# EAGLE board BEP31_final_kopie_90Grad (EAGLE 6.5.0)
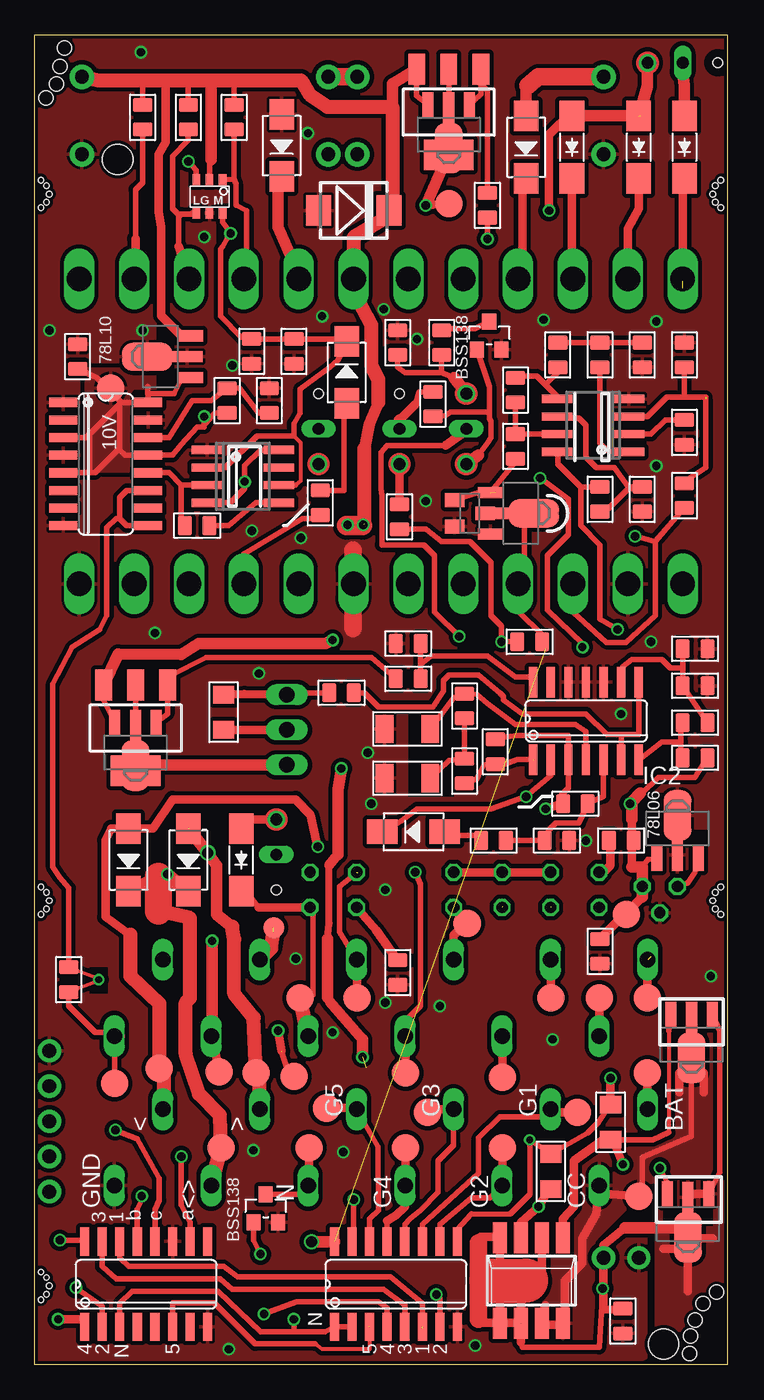
[diagram p0: board, top side]
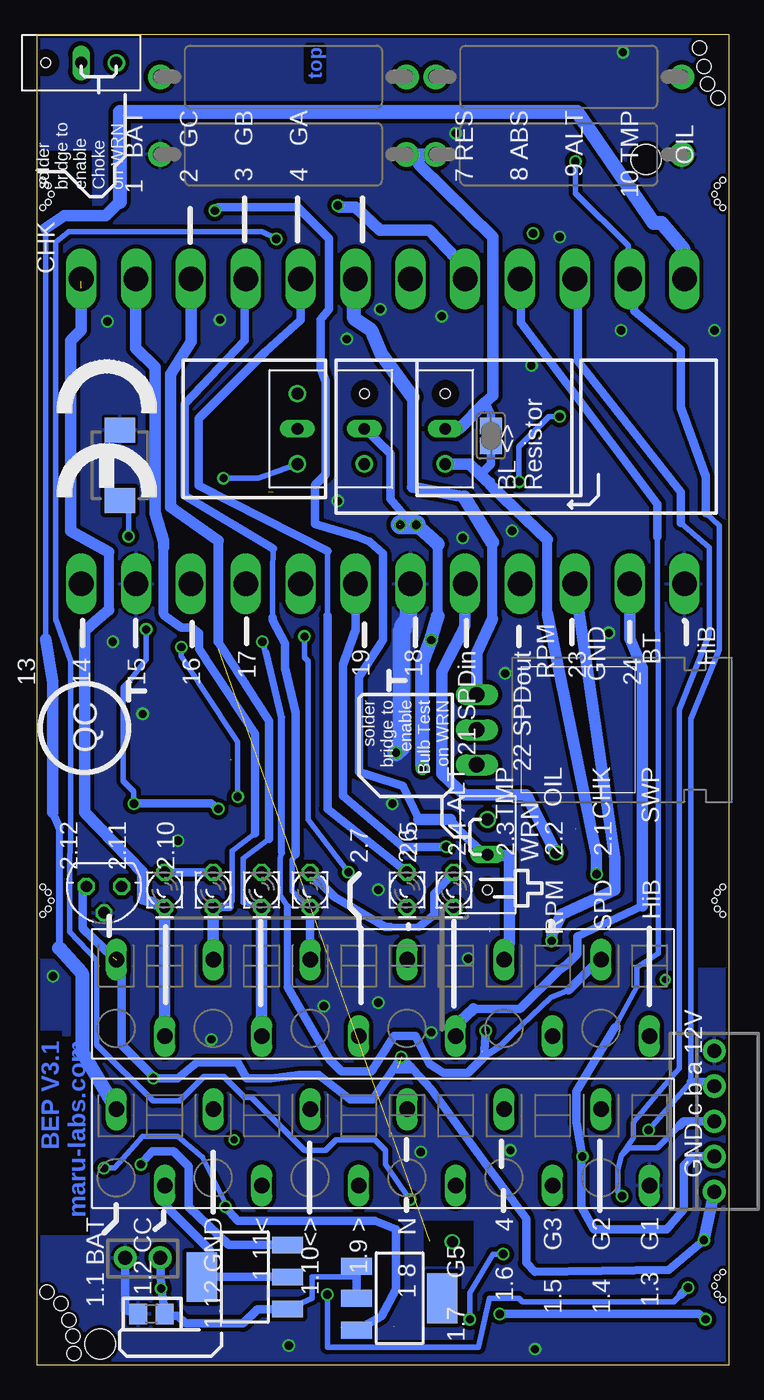
[diagram p1: board, bottom side, seen from below]

Size 50 x 96 mm. Coordinates in mm from the lower left corner, seen from the top.
Outline: 50,96 50,0 0,0 0,96 50,96
Copper layers (1*16): Top 0.035mm / dielectric 1.5mm / Bottom 0.035mm
Design rules "multi-cb_035um-cu *": minimum track width 6mil, minimum drill 12mil, track to track 12mil, track to pad 12mil, pad to pad 6mil, via to via 6mil, smd to smd 6mil, copper to edge 10mil, drill to drill 8mil, minimum pad ring 8mil, minimum via ring 6mil, stop-mask expansion 3mil, vias tented up to drill 0mil, thermal gap 8mil
Holes 1.02 mm at 47.29,0.81 47.36,2.08 47.67,3.23 48.25,4.43 49.23,5.24 2.14,95.05 1.83,93.71 1.57,92.44 0.81,91.43
Holes 2.18 mm at 45.4,1.5 6,87
Holes 0.4 mm at 48.94,33.5 49.14,34.1 49.54,34.5 49.14,32.9 49.54,32.5 48.94,84.5 49.14,85.1 49.54,85.5 49.14,83.9 49.54,83.5 1.06,84.5 0.86,83.9 0.46,83.5 0.86,85.1 0.46,85.5 1.06,33.5 0.86,32.9 0.46,32.5 0.86,34.1 0.46,34.5 1.06,5.7 0.86,5.1 0.46,4.7 0.86,6.3 0.46,6.7
tRestrict: area 27,41 to 30.3,47.5; area 4,26.8 to 5.3,28.7; area 32.7,58.4 to 34.7,60.2; area 5.1,44.1 to 9.4,45.5; area 44.1,37.3 to 48.6,38.6; area 44.2,38.6 to 45.4,41.3; area 45.4,10 to 48.9,11.4; area 8.8,70.3 to 10.1,75; area 27.7,88.4 to 28.9,90; area 13.1,81.1 to 13.3,82.2
bRestrict: area 46.1,9.4 to 49.7,19.6; area 48.2,19.5 to 49.7,24.1; area 47.8,29.3 to 50,35.8; area 0.2,28.7 to 2.6,35.2; area 46,81.6 to 49.8,87.6; area 18.5,7.1 to 22,10.4

## Footprints (pad centres in the part's own frame; a part is rotated, then mirrored left to right if it is on the bottom)
12-PIN = drill 1.118 long: 1 19.25,-2.45; 2 15.75,3.05; 3 12.25,-2.45; 4 8.75,3.05; 5 5.25,-2.45; 6 1.75,3.05; 7 -1.75,-2.45; 8 -5.25,3.05; 9 -8.75,-2.45; 10 -12.25,3.05; 11 -15.75,-2.45; 12 -19.25,3.05
B2.0 = smd 2 x 2: TP 0,0
C0805 = smd 1.397 x 1.016: 1 0,0.889; 2 0,-0.889
C1206 = smd 1.27 x 2.032: 1 -1.651,0; 2 1.651,0
DO-214AC = smd 2.2 x 1.77: 1 -2.242,0; 2 2.242,0
DO-214AC_SLIM = smd 2.2 x 1.77: 1 -2.242,0; 2 2.242,0
DO214AA = smd 1.8 x 2.2: A 2.55,0; C -2.55,0
DO214AA_BI = smd 1.8 x 2.2: A 2.45,0; C -2.65,0
ROUND_1.5MM_TPLACE = smd 1.5 x 1.5: P$1 0,0
78LXX = drill 0.813 octagon: GND 0,1.905; IN 1.27,0; OUT -1.27,0
SOT89_ROUND = smd 0.8 x 1.8: 1 -1.499,-2.181; 3 1.499,-2.181 | smd 0.8 x 2.3: 2 0,-1.927 | smd 2.032 x 3.65: 2@1 0,0.94
SO16 = smd 0.66 x 2.032: 1 -4.445,-3.073; 2 -3.175,-3.073; 3 -1.905,-3.073; 4 -0.635,-3.073; 5 0.635,-3.073; 6 1.905,-3.073; 7 3.175,-3.073; 8 4.445,-3.073; 9 4.445,3.073; 10 3.175,3.073; 11 1.905,3.073; 12 0.635,3.073; 13 -0.635,3.073; 14 -1.905,3.073; 15 -3.175,3.073; 16 -4.445,3.073
TO220H_NOHOLE = drill 1.118 long: 1 -2.54,-10.16; 2 0,-10.16; 3 2.54,-10.16
SO08 = smd 0.6 x 2.2: 1 -1.905,-2.6; 2 -0.635,-2.6; 3 0.635,-2.6; 4 1.905,-2.6; 5 1.905,2.6; 6 0.635,2.6; 7 -0.635,2.6; 8 -1.905,2.6
SO14 = smd 0.6 x 2.2: 1 -3.81,-2.8; 2 -2.54,-2.8; 3 -1.27,-2.8; 4 0,-2.8; 5 1.27,-2.8; 6 2.54,-2.8; 7 3.81,-2.8; 8 3.81,2.8; 9 2.54,2.8; 10 1.27,2.8; 11 0,2.8; 12 -1.27,2.8; 13 -2.54,2.8; 14 -3.81,2.8
JP2_SMALLPADS = drill 0.85: 1 -2.54,0 | drill 0.85 long: 2 0,0 | hole 0.7: 2.54,0
LD260 = drill 0.813 octagon: A -1.27,0; K 1.27,0
SOT89 = smd 0.8 x 1.8: 1 -1.499,-2.181; 3 1.499,-2.181 | smd 0.8 x 2.3: 2 0,-1.927 | smd 2.032 x 3.65: 2@1 0,0.94
SOT223 = smd 1.219 x 2.235: 1 -2.311,-3.099; 2 0,-3.099; 3 2.311,-3.099 | smd 3.6 x 2.2: 4 0,3.099
SOT-23 = smd 1.016 x 1.143: 1 -0.889,-1.016; 2 0.889,-1.016; 3 0,1.016
R0805 = smd 1.397 x 1.016: 1 0,0.889; 2 0,-0.889
R1206 = smd 1.27 x 1.524: 1 -1.27,0; 2 1.27,0
V235/17_1MM = drill 1 pad 1.778: 1 -8.89,0; 2 8.89,0
R0805' = smd 1.3 x 1.5: 1 -0.95,0; 2 0.95,0
SJ = smd 1.2 x 1.6: 1 -0.725,0; 2 0.725,0
SM8 = smd 1.016 x 2.235: 1 -2.286,-3.099; 2 -0.762,-3.099; 3 0.762,-3.099; 4 2.286,-3.099; 5 2.286,3.099; 6 0.762,3.099; 7 -0.762,3.099; 8 -2.286,3.099
SOT23-BEC = smd 1 x 1.4: B -0.95,-1.1; C 0,1.1; E 0.95,-1.1
B1,27 = smd 1.5 x 1.5: TP 0,0
JP2_ORIG_SMALLPADS = drill 0.85: 1 -2.54,0; 3 2.54,0 | drill 0.85 long: 2 0,0
SOT457R_PHILIPS = smd 0.55 x 0.8: 1 -0.95,-1.2; 2 0,-1.2; 3 0.95,-1.2; 4 0.95,1.2; 5 0,1.2; 6 -0.95,1.2
24-PIN_V2 = drill 1.778 long: 1 -21.78,-11; 2 -17.82,-11; 3 -13.86,-11; 4 -9.9,-11; 5 -5.94,-11; 6 -1.98,-11; 7 1.98,-11; 8 5.94,-11; 9 9.9,-11; 10 13.86,-11; 11 17.82,-11; 12 21.78,-11; 13 -21.78,11; 14 -17.82,11; 15 -13.86,11; 16 -9.9,11; 17 -5.94,11; 18 -1.98,11; 19 1.98,11; 20 5.94,11; 21 9.9,11; 22 13.86,11; 23 17.82,11; 24 21.78,11
22-23-2021 = drill 1 pad 1.676: 1 -1.27,0; 2 1.27,0
22-23-2051 = drill 1 pad 1.676: 1 -5.08,0; 2 -2.54,0; 3 0,0; 4 2.54,0; 5 5.08,0

## Placement (x,y rotation side)
1  [12-PIN]  25,15.99 180 bottom
2  [12-PIN]  25,26.79 180 bottom
6V  TPSB2.0  [B2.0]  42.72,32.5 90 top
10V  TPSB2.0  [B2.0]  5.5,70.5 90 top
C1  2.2nF  [C0805]  18.72,73.14 180 top
C2  100u  [C1206]  26.91,42.34 180 top
C3  100u  [C1206]  26.91,45.9 180 top
C4  100nF,  [C0805]  40.82,29.83 0 top
C5  100nF.  [C0805]  47.67,49.01 90 top
C7  100nF  [C0805]  3.1,72.76 180 top
C8  4.7u  [C0805]  46.91,72.89 180 top
C9  100nF.  [C0805]  26.97,52.06 90 top
C10  100nF  [C0805]  16.94,69.58 180 top
C11  100nF,  [C0805]  43.86,72.89 0 top
D1  1N4007.  [DO-214AC]  35.48,87.87 270 top
D2  1N5817  [DO-214AC_SLIM]  38.78,87.87 270 top
D3  1N4007  [DO-214AC]  22.53,71.62 90 top
D4  SM6T  [DO214AA]  23.04,83.3 180 top
D5  SM6TDO214AA_BI  [DO214AA_BI]  43.99,65.01 90 bottom
D8  1N4007  [DO-214AC]  27.35,38.47 180 top
D10  1N4007,  [DO-214AC]  11.1,36.44 270 top
D11  1N4007,  [DO-214AC]  6.78,36.44 270 top
D12  1N5817.  [DO-214AC_SLIM]  43.61,87.87 270 top
D13  1N5817.  [DO-214AC_SLIM]  46.91,87.87 270 top
D14  1N5817  [DO-214AC_SLIM]  14.91,36.44 270 top
D15  1N4007.  [DO-214AC]  17.83,88 270 top
FID1  FID1  [ROUND_1.5MM_TPLACE]  5.74,23.74 90 top
FID2  FID2  [ROUND_1.5MM_TPLACE]  42.81,78.37 90 top
IC1  6V pos  [78LXX]  45.13,34.53 180 bottom
IC2  78L06  [SOT89_ROUND]  46.4,38.72 0 top
IC3  4028  [SO16]  8.05,5.83 0 top
IC4  317TO202H_NOHOLE  [TO220H_NOHOLE]  8.05,45.84 270 bottom
IC5  555  [SO08]  15.04,64.12 270 top
IC6  ULN2004  [SO16]  26.08,5.83 0 top
IC7  LM339  [SO14]  39.8,46.47 0 top
IC8  4538  [SO16]  5.13,65.01 270 top
IC9  78L10  [SOT89_ROUND]  9.07,72.76 90 top
IC10  LM2904  [SO08]  40.31,67.81 90 top
JP1  [JP2_SMALLPADS]  20.5,67.55 90 bottom
JP2  [JP2_SMALLPADS]  46.78,93.97 180 bottom
JP3  [JP2_SMALLPADS]  26.34,67.55 90 bottom
JP4  [JP2_SMALLPADS]  17.45,36.82 270 bottom
LED1  [LD260]  40.75,34.28 270 bottom
LED2  [LD260]  37.25,34.28 270 bottom
LED3  [LD260]  33.75,34.28 270 bottom
LED4  [LD260]  30.25,34.28 270 bottom
LED6  [LD260]  23.25,34.28 270 bottom
LED7  [LD260]  19.88,34.28 270 bottom
Q1  BA  [SOT89]  29.89,88.76 180 top
Q2  BA  [SOT89]  7.29,44.18 180 top
Q3  AH-16  [SOT223]  29.89,90.41 180 top
Q4  (AH-16)  [SOT223]  7.29,45.96 180 top
Q5  (AH-16)  [SOT223]  34.97,6.34 90 bottom
Q6  (AH-16)  [SOT223]  23.8,4.81 270 bottom
Q7  BA.  [SOT89]  47.17,10.15 180 top
Q8  BA.  [SOT89]  47.42,23.1 180 top
Q9  MY  [SOT89]  35.1,61.46 270 top
Q10  J1  [SOT-23]  32.81,74.28 0 top
Q11  J1  [SOT-23]  16.69,11.29 0 top
R1  4701  [R0805]  46.91,62.73 0 top
R2  1002  [R0805]  46.91,67.3 180 top
R3  100  [R0805]  35.74,52.19 90 top
R4  (101)  [R0805]  26.21,28.31 0 top
R5  1002  [R0805]  22.15,48.5 270 top
R6  1502  [R0805]  47.67,43.8 90 top
R7  100  [R0805]  29.39,73.78 180 top
R8  2702  [R0805]  47.67,51.68 270 top
R9  4701  [R0805]  26.97,49.52 90 top
R10  104  [R0805]  31.04,42.85 0 top
R11  (1000)  [R0805]  42.34,37.83 90 top
R12  104  [R0805]  31.04,47.55 0 top
R13  102  [R0805]  32.69,83.68 180 top
R14  (101)  [R0805]  26.21,73.78 180 top
R15  1502  [R0805]  39.04,40.5 270 top
R16  1002  [R0805]  37.7,37.83 270 top
R17  2201  [R0805]  33.13,37.83 90 top
R18  13  [R1206]  13.64,47.1 270 top
R19  1002  [R0805]  33.26,44.25 0 top
R20  13  [R1206]  37.26,13.96 270 top
R21  13  [R1206]  41.58,17.51 270 top
R22  104  [R0805]  28.75,69.33 0 top
R23  2201  [R0805]  26.34,61.2 180 top
R24  104  [R0805]  15.67,73.14 0 top
R25  2702  [R0805]  47.67,46.34 90 top
R26  (1002)  [R0805]  11.73,60.57 90 top
R27  47  [V235/17_1MM]  32.18,92.95 0 bottom
R28  47  [V235/17_1MM]  12.3,92.95 0 bottom
R29  104  [R0805]  7.8,90.03 180 top
R30  104  [R0805]  11.1,90.03 180 top
R31  104  [R0805]  14.4,90.03 180 top
R32  4701  [R0805]  34.72,66.28 0 top
R33  2702  [R0805]  20.62,62.22 0 top
R34  2702  [R0805]  13.89,69.58 0 top
R35  (1002)  [R0805]  2.46,27.8 180 top
R36  47  [V235/17_1MM]  32.18,87.36 0 bottom
R37  47  [V235/17_1MM]  12.3,87.36 180 bottom
R38  102  [R0805]  42.47,3.16 0 top
R39  R_user  [R0805']  41.7,3.67 180 bottom
R42  1002  [R0805]  40.82,72.89 0 top
R43  102  [R0805]  37.77,72.89 0 top
R44  2702  [R0805]  34.72,70.35 180 top
R45  102  [R0805]  40.82,62.47 180 top
R46  102  [R0805]  43.86,62.47 180 top
SJ1  [SJ]  17.19,67.04 90 bottom
START  TPSB2.0  [B2.0]  29.89,83.81 90 top
T1  PNP2SM8  [SM8]  35.86,6.08 180 top
T3  (1D)  [SOT23-BEC]  31.42,61.46 270 top
TP1  TPSB2.0  [B2.0]  44.24,21.07 90 top
TP2  TPSB2.0  [B2.0]  43.61,12.18 90 top
TP3  TPSB2.0  [B2.0]  39.16,18.21 90 top
TP4  TPSB2.0  [B2.0]  33.77,15.67 90 top
TP5  TPSB2.0  [B2.0]  28.37,18.21 90 top
TP6  TPSB2.0  [B2.0]  26.78,15.67 90 top
TP7  TPSB2.0  [B2.0]  21.07,18.53 90 top
TP8  TPSB2.0  [B2.0]  19.8,15.67 90 top
TP9  TPSB2.0  [B2.0]  15.99,21.07 90 top
TP10  TPSB2.0  [B2.0]  13.45,15.67 90 top
TP11  TPSB2.0  [B2.0]  9,21.39 90 top
TP12  TPSB2.0  [B2.0]  44.24,26.47 90 top
TP13  TPSB2.0  [B2.0]  5.76,20.31 90 top
TP16  TPSB2.0  [B2.0]  40.75,26.47 90 top
TP17  TPSB2.0  [B2.0]  37.26,26.47 90 top
TP18  TPSB2.0  [B2.0]  33.77,20.75 90 top
TP19  TPSB2.0  [B2.0]  31.23,31.86 90 top
TP21  TPSB2.0  [B2.0]  26.78,21.07 90 top
TP22  TPSB2.0  [B2.0]  23.29,26.47 90 top
TP23  TPSB2.0  [B2.0]  19.16,26.47 90 top
TP24  TPSB1,27  [B1,27]  17.26,31.55 90 top
TP25  TPSB2.0  [B2.0]  13.32,21.13 90 top
TP26  TPSB2.0  [B2.0]  18.72,20.82 90 top
U$1  [CE_10.00]  48.56,72.63 270 bottom
U$2  JP2E_ORIG  [JP2_ORIG_SMALLPADS]  31.16,67.55 90 bottom
U$3  NUP4304SOT457_R  [SOT457R_PHILIPS]  12.62,84.32 180 top
X1  [24-PIN_V2]  25,67.36 180 bottom
X2  22-23-2021  [22-23-2021]  42.34,7.74 0 bottom
X3  22-23-2051  [22-23-2051]  1.06,17.58 90 bottom

## Library data of the parts
1 2 = con WAGO BMW
6V 10V START TP1-TP13 TP16-TP19 TP21-TP26 = testpin_BMW
C1 C4 C5 C7 C9-C11 = Seeed-Capacitor-2016; MPN: CC0805KRX7R9BB104
C2 C3 = Seeed-Capacitor-2016; MPN: GRM31CR60J107ME39L
C8 = Seeed-Capacitor-2016; MPN: CC0805KKX5R8BB475
D1 D3 D8 D10 D11 D15 = Diode-do214ac; MPN: 1N4007
D2 D12-D14 = Diode-do214ac
D4 D5 = Suppressor_Diode_DO214AA
FID1 FID2 = Fiducials_TVM802B
IC1 = v-reg
IC2 IC9 = 78LXX
IC3 = 4028
IC4 IC10 = linear_BMW
IC5 = linear
IC6 = uln-udn
IC7 = LM339
IC8 = 45xx
JP1-JP4 U$2 = Switch Aliexpress 2
LED1-LED4 LED6 LED7 = led
Q1 Q2 Q7-Q9 = Transistor_SOT89
Q3-Q6 = BCP53_
Q10 Q11 = Seeed-Transistor-2016; MPN: BSS138W-7-F
R1 R8 R9 R25 R32 R34 R35 R44 = Seeed-Resistor-2016; MPN: RC0805JR-074K7L
R2 R5 R6 R10 R12 R15 R16 R19 R22 R24 R26 R29-R31 R33 R42 = Seeed-Resistor-2016; MPN: RC0805FR-0710KL
R3 = Seeed-Resistor-2016; MPN: RC0805JR-07220RL
R4 R11 = Seeed-Resistor-2016; MPN: RC0805JR-07100RL
R7 R14 R17 R23 = Seeed-Resistor-2016; MPN: RC0805JR-072K2L
R13 R38 R43 R45 R46 = Seeed-Resistor-2016; MPN: RC0805JR-071KL
R18 R20 R21 = Seeed-Resistor-2016; MPN: RC1206JR-0713RL
R27 R28 R36 R37 R39 = rcl
SJ1 = solder-jumper
T1 = PNP2SM8; OC_FARNELL: unknown; OC_NEWARK: unknown
T3 = transistor
U$1 = logo
U$3 = NUP4304_ESD_Diode_Array
X1 = con_BMW
X2 = con_Molex_BMW; MF: MOLEX; MPN: 22-23-2021; OC_FARNELL: 1462926; OC_NEWARK: 25C3832
X3 = con_Molex_BMW; MF: MOLEX; MPN: 22-23-2051; OC_FARNELL: 1462952; OC_NEWARK: 38C9178

## Nets
+10V: 10V.TP C7.1 IC5.4 IC5.8 IC8.3 IC8.5 IC8.13 IC8.16 IC9.1 R34.2
+12V: 2.1 D4.C IC1.IN IC2.3 IC3.16 IC6.9 IC9.3 JP3.2 Q1.3 Q2.3 Q3.3 Q4.3 R20.1 R21.1 R22.1 R28.2 R29.2 R30.2 R31.2 TP12.TP U$3.2 X1.6 X3.1
+12V1: IC10.7 R32.1 R44.1
GND: 1.12 C1.1 C2.2 C3.2 C4.2 C5.2 C7.2 C8.2 C9.1 C10.2 C11.2 D4.A D5.A D15.1 IC1.GND IC2.2 IC2.2@1 IC3.8 IC3.11 IC5.1 IC6.8 IC7.10 IC7.11 IC7.12 IC8.1 IC8.4 IC8.8 IC8.15 IC9.2 IC9.2@1 IC10.4 Q9.3 Q10.2 Q11.2 R2.1 R4.2 R8.1 R14.2 R16.1 R24.2 R36.1 R37.1 R38.2 R39.2 R46.1 T3.E U$3.5 X1.13 X1.18 X1.23 X2.1 X3.5
N$1: 2.9 D2.1 D12.1 JP2.1 JP4.2 TP24.TP
N$2: IC3.10 R31.1 U$3.1 X1.4 X3.2
N$3: IC3.13 R30.1 U$3.4 X1.3 X3.3
N$4: 2.7 LED6.A TP22.TP X1.8
N$5: Q5.3 Q8.3 R21.2 T1.1
N$6: D8.2 IC7.2 Q10.1 R22.2 U$2.1
N$7: IC10.2 R2.2
N$8: R27.2 R28.1
N$9: Q6.3 Q7.3 R20.2 T1.3
N$11: D15.2 Q1.2 Q3.2 START.TP X1.5
N$12: 2.2 D13.2 LED1.K TP16.TP X1.12
N$13: 2.3 D12.2 LED2.K TP17.TP X1.11
N$14: 2.4 D2.2 LED3.K TP18.TP X1.10
N$15: IC4.3 Q2.2 Q4.2
N$16: IC7.6 IC7.8 R5.1
N$17: IC3.12 R29.1 U$3.3 X1.2 X3.4
N$18: IC3.15 IC6.5
N$19: 2.8 D14.2 LED7.K TP23.TP X1.14
N$20: 1.9 D10.1 TP9.TP X1.17
N$21: 1.11 D11.1 TP11.TP X1.19
N$22: IC8.9 IC8.11 R35.2
N$23: D5.C R1.2 X1.22
N$24: C8.1 IC10.3 R1.1
N$25: 1.6 IC6.13 TP6.TP
N$26: 1.7 IC6.14 TP7.TP
N$27: 2.11 R3.1 R23.1 TP26.TP
N$28: 2.6 TP21.TP U$2.2
N$29: JP3.1 R23.2
N$30: C5.1 IC7.9 R8.2 R25.2
N$31: C9.2 IC7.14 R9.2
N$32: C1.2 D3.2 IC5.2 IC5.6 R24.1 U$3.6
N$34: LED6.K R4.1
N$35: IC4.1 R5.2 R18.1 X1.7
N$36: Q2.1 Q4.1 R9.1
N$37: IC3.2 IC6.7
N$38: 1.3 IC6.11 TP3.TP
N$39: 1.5 IC6.12 TP5.TP
N$41: LED1.A LED2.A LED3.A LED4.A LED7.A R11.1
N$42: R33.2 X1.16
N$43: Q1.1 Q3.1 R13.2
N$44: IC3.3 IC6.1 IC6.2 Q11.1
N$45: C2.1 R10.1 R12.2
N$46: C3.1 IC7.4 R12.1
N$47: IC7.5 R15.1 R16.2 R17.2
N$48: Q10.3 R7.2
N$49: D8.1 R17.1
N$50: IC3.1 IC6.4
N$52: 1.8 Q11.3 TP8.TP
N$53: 2.10 TP25.TP X1.15
N$54: D1.1 R27.1
N$55: 2.5 D1.2 LED4.K TP19.TP X1.9
N$56: IC3.14 IC6.6
N$57: Q5.1 Q6.1 Q6.2 Q7.1 Q7.2 Q8.1 R38.1 R39.1 T1.2 T1.4 T1.6 X2.2
N$59: 1.2 Q5.2 Q8.2 T1.8 TP2.TP
N$60: IC7.13
N$61: IC3.6 IC6.3
N$64: IC4.2 R18.2
N$65: IC5.5 R26.2
N$67: 1.4 IC6.10 TP4.TP
N$69: 1.1 TP1.TP X1.1
N$83: IC7.7 R6.1 R25.1
N$84: IC6.16 Q9.2 R3.2 T3.C X1.21
N$85: Q9.1 R32.2 T3.B
N$86: IC5.3 IC8.12 R26.1
N$87: D3.1 R33.1
N$88: IC6.15 R13.1
N$89: C10.1 IC8.14 R34.1
N$90: 2.12 R35.1 TP13.TP
N$92: IC10.1 R42.2
N$93: 1.10 D10.2 D11.2 JP1.1 SJ1.1 TP10.TP
N$94: JP1.2 R36.2 R37.2 SJ1.2
N$95: D13.1 JP2.2
N$96: C11.1 R42.1 R43.1
N$97: IC10.5 R43.2 R44.2
N$98: D14.1 JP4.1
N$99: R7.1 R14.1 U$2.3
N$101: IC10.6 R45.1 R46.2
N$580: IC7.1 R10.2 R19.2
VCC: 6V.TP C4.1 IC1.OUT IC2.1 IC7.3 IC10.8 R6.2 R11.2 R15.2 R19.1 R45.2

## Tracks (layer width: path | path; a pad name or v marks a point on that pad's centre or on a via)
+10V  (via drill 0.6)
  Top 0.406: 6.14,69.33 3.73,66.92 IC8.3 | 6.27,69.46 IC8.16 8.18,70.6 8.18,70.09 10.08,70.09 10.59,71.11 10.99,71.26 IC9.1 | 12.11,67.68 13,68.69 R34.2 | 6.14,66.16 6.14,66.03 6.53,65.65 IC8.13 9.96,65.65 10.59,66.41 11.73,67.68 12.11,67.68 | 6.14,66.16 6.14,69.33 | 6.14,69.33 6.27,69.46 | IC5.4 14.15,62.22 15.16,63.23 v15.16,63.74 15.16,64.89 16.3,66.03 IC5.8 | C7.1 4.49,71.23 6.27,69.46 | v12.24,68.44 12.24,67.68 12.11,67.68 | IC8.5 3.99,64.38 | 3.99,64.38 4.37,64.38 6.14,66.16 | 3.99,64.38 3.99,67.04
  Bottom 0.406: v12.24,68.44 13,68.44 15.16,66.28 v15.16,63.74
  pour Top: 3.73,64.38 3.73,71.87 9.7,71.87 9.7,70.47 7.16,70.47 6.78,70.09 6.78,64.5 3.86,64.5
+12V  (via drill 0.5, 0.6)  (3 unrouted)
  Top 0.35: 31.55,10.91 34.34,10.91
  Top 0.406: IC3.16 3.6,9.01 v1.83,9.01 | R21.1 40.69,17.51 39.93,16.75 R20.1 v35.74,16.24 35.74,12.31 34.34,10.91 | IC2.3 47.65,35.52 47.17,34.79 IC1.IN | Q2.3 4.98,47.99 Q4.3 | Q1.3 27.58,91.58 Q3.3 | R31.2 14.4,92.7 | R30.2 11.1,92.7 | 10.59,74.28 IC9.3 | R22.1 27.73,70.22 27.48,69.33 | U$3.2 12.62,86.86 12.75,86.98 | R29.2 7.8,92.7 | IC6.9 30.53,9.77 31.55,10.91 | D4.C 25.83,83.05
  Top 0.5: 21.13,30.72 21.26,31.86 21.26,36.06
  Top 0.61: 2.1 TP12.TP 43.86,26.09 | 21.26,26.28 21.13,26.53 | R21.1 v41.58,20.69 | 9.45,92.7 9.45,88.25 8.94,87.36 8.94,83.17 9.14,82.16 9.14,75.73 10.59,74.28 | 27.48,69.33 26.34,68.19
  Top 0.711: 21.26,26.28 23.67,23.48 | 21.26,36.06 21.89,36.82
  Top 0.813: 23.67,23.48 v23.67,22.21 | 21.13,26.53 21.13,30.72 | 21.89,36.82 21.89,41.52 v22.15,43.04 | 23.8,66.09 24.18,67.93 24.81,69.46 | Q4.3 6.02,51.3 10.56,51.27 11.84,52.06 21,52.06 v21.51,52.31 | Q3.3 25.83,92.47 25.83,90.79 | 26.34,68.19 JP3.2 | 12.75,86.98 12.75,92.7
  Top 1.016: R28.2 4.62,92.7 7.8,92.7 9.45,92.7 11.1,92.7 12.75,92.7 14.4,92.7 19.23,92.7 19.86,91.68 21.13,90.79 25.83,90.79 25.83,83.05 23.04,81.37 X1.6 22.78,77.94 24.31,75.05 24.31,72.12 24.81,71.11 24.81,69.46 | 23.8,60.69 23.8,66.09
  Bottom 0.406: IC1.IN 46.66,34.28 | 44.5,29.45 44.5,29.48
  Bottom 0.61: v1.83,9.01 4.34,6.85 14.02,6.72 14.65,7.35 14.65,10.53 17.45,14.34 21.51,19.93 v23.67,22.21 25.7,19.16 27.35,19.16 29.64,20.94 31.04,20.94 33.07,20.69 34.85,20.69 35.48,21.83 38.4,21.83 39.8,20.69 v41.58,20.69 41.58,20.82 43.86,23.1 43.86,28.85 2.1 | 46.66,34.28 46.66,31.48 44.5,29.45 | JP3.2 24.43,65.77 24.43,62.47 23.04,60.82 v23.73,60.63
  Bottom 0.711: 21.03,54.03 21.03,59.23
  Bottom 0.813: v1.83,9.01 X3.1 | 23.04,21.45 23.93,21.45
  Bottom 1.016: v22.15,43.04 22.15,50.66 v21.51,52.31 21.03,54.03 | 21.03,59.23 v22.59,60.63
  Bottom 1.422: v22.59,60.63 v23.73,60.63
+12V1
  Top 0.406: IC10.7 R32.1 R44.1
GND  (via drill 0.6)
  Top 0.406: IC2.2@1 IC2.2
  Top 1.27: 22.97,58.79 22.97,53.14
  Bottom 0.61: X2.1 43.61,3.92 R39.2
  Bottom 1.27: v24.05,44.18 23.67,44.56 23.67,52.95 23.54,53.07 23.54,53.33 23.16,53.84 23.16,54.98
  other vias: 19.23,59.68 37.39,23.48 15.8,15.48 7.67,94.73 39.8,37.83 24.31,40.5 31.8,1.39 14.02,1.13 44.88,75.3 25.32,34.28 42.34,46.98 48.82,28.05 22.27,15.36 28.24,62.34 1.06,74.66 25.32,26.15 18.84,29.32 8.69,52.82 12.24,81.39 36.75,75.43 21.51,23.99 16.18,49.9 20.75,75.68 14.27,72.12 7.8,74.66 19.73,88.89 25.2,76.19 44.5,52.19 27.61,74.03 44.88,64.89 29.26,25.9 15.67,60.19
  pour Top (rank 3): -0.08,96 -0.08,0.12 43.1,-0.01 44.12,0.5 44.12,9.89 44.5,13.07 49.83,13.07 50.09,96
  pour Bottom: -0.08,96 -0.08,0.12 50.09,0.12 50.09,96
N$1  (via drill 0.6)  (2 unrouted)
  Top 0.61: 38.78,90.41 37.13,88.76 v37.13,83.3 37.13,83.68
  Top 0.813: 43.74,90.16 39.42,90.16 D2.1 38.78,90.41 | JP2.1 44.24,92.27 D12.1
  Top 1.016: 17.26,31.23 17.08,30.1 17.08,30.07 2.9
  Bottom 0.61: 22.4,39.36 23.54,41.77 26.72,42.79 26.72,49.65 24.99,52.31 24.99,58.53 25.96,59.42 26.97,59.8 29.89,60.69 29.89,63.49 29.13,64.25 29.13,70.98 29.51,72 29.51,75.43 28.88,76.19 28.88,81.27 31.16,83.55 36.88,83.55 v37.13,83.3 | 20.11,39.36 19.35,38.47 17.7,36.82 JP4.2
  Bottom 0.813: 22.4,39.36 20.11,39.36 | 2.9 15.86,30.54 15.86,36.76 17.38,36.76 JP4.2
N$2  (via drill 0.6)
  Top 0.406: v10.59,15.04 10.59,11.54 11.22,10.28 IC3.10 | U$3.1 13.83,85.53 14.4,85.59 | 14.4,85.59 R31.1 | 14.4,85.59 14.53,85.2 14.53,83.68 15.29,83.3 15.29,78.56 X1.4
  Bottom 0.406: 5.18,59.74 5.18,53.71 5.13,50.41 5.13,29.71 6.65,28.69 6.65,27.29 8.24,24.37
  Bottom 0.61: X1.4 15.04,78.15 15.04,75.2 5.18,62.12 5.18,59.74 | 8.24,24.37 11.03,19.74 11.03,17.51 v10.59,15.04 10.65,14.97 10.65,11.42 9.76,9.77 4.49,9.77 3.29,11.23 3.29,14.4 2.65,15.04 X3.2
N$3  (via drill 0.6)
  Top 0.406: IC3.13 7.42,11.23 7.73,11.86 v7.73,12.18 | 11.35,83.12 U$3.4 11.35,83.05 10.59,83.05 10.46,82.92 | 10.38,80.72 10.38,82.83 10.46,82.92 | R30.1 11.1,88.38 9.96,87.24 9.96,83.43 10.46,82.92
  Top 0.61: X1.3 10.38,80.72
  Bottom 0.406: 3.48,60.76 1.45,58.98 1.45,52.76 3.6,47.3 3.6,21.39 4.62,20.24 6.91,17.51 6.91,16.37 7.79,15.13 | v7.73,12.18 8.05,12.5 8.05,14.09 7.79,15.13 | 3.6,17.26 5.19,15.67 7.25,15.67 7.79,15.13
  Bottom 0.61: X1.3 10.91,77.98 10.91,72.44 3.48,62.98 3.48,60.76 | X3.3 3.29,17.58 3.6,17.26
N$4  (1 unrouted)
  Top 0.406: 2.7 22.02,31.23 22.02,34.53 23.25,35.51
  Top 0.61: TP22.TP 23.29,29.2 2.7 | 23.25,35.51 LED6.A
  Bottom 0.406: 29,58.73 29,54.09
  Bottom 0.61: X1.8 30.94,75.4 33.45,73.14 38.31,68.28 38.31,63.45 29,58.73 | 29,54.09 29,40.12 23.54,35.8 23.42,35.67 23.35,35.48
N$5  (via drill 0.6)  (1 unrouted)
  Top 0.305: 45.77,24.12 45.77,16.78
  Top 0.406: Q8.3 45.77,24.12 | 45.77,16.78 44.63,16.24 42.09,16.24 41.83,15.99
  Top 0.61: T1.1 38.15,10.53 38.91,11.42 38.91,14.72 41.07,16.24 | v42.47,14.47 41.83,15.99 R21.2
  Bottom 0.61: Q5.3 36.14,8.65 39.04,11.42 39.04,14.32 40.12,15.4 41.66,15.4 v42.47,14.47
N$6  (via drill 0.6)
  Top 0.406: 24.69,38.47 D8.2 26.52,39.28 27.61,40.12 32.94,40.12 v35.48,41.01 37.26,42.53 IC7.2 | Q10.1 32.81,70.6 32.81,68.76 | 32.81,68.76 32.81,68.31 32.94,68.06 32.94,66.92 32.69,66.54 32.05,65.65 | v39.55,51.8 39.55,52.06 37.01,54.47 37.01,58.41 38.53,59.93 38.53,62.47 v36.5,64 | R22.2 29.64,68.5 30.02,68.76 32.81,68.76
  Top 0.813: 32.05,65.65 U$2.1
  Bottom 0.406: v35.48,41.01 35.48,44.95 39.55,51.17 v39.55,51.8 | v36.5,64 33.96,64 U$2.1
N$7
  Top 0.406: IC10.2 44.5,67.17 45.52,68.19 R2.2
N$8
  Top 1.27: R27.2 R28.1
N$9  (via drill 0.6)
  Top 0.406: v45.13,14.21 45.64,13.2 Q7.3 | 36.12,11.29 v36.37,11.42 | 37.01,12.43 R20.2
  Top 0.61: T1.3 35.1,10.28 v36.37,11.42 37.01,12.43
  Bottom 0.406: v36.37,11.42 36.24,11.42 38.02,14.97 39.8,16.5 42.34,16.5 44.37,14.21 v45.13,14.21
  Bottom 0.61: Q6.3 25.09,3.52 24.05,5.45 24.05,9.77 25.58,10.4 35.48,10.4 v36.37,11.42
N$10
  Top 0.406: 32.43,3.04 32.43,5.58 32.94,6.08
  Top 0.61: 32.43,3.04 34.97,3.04
  Top 3.175: 32.94,6.08 35.48,6.08
N$11  (via drill 0.6)
  Top 0.406: Q3.2 Q1.2 29.89,87.49
  Top 0.61: START.TP v28.24,83.68
  Top 0.813: v28.24,83.68 29.89,87.49 | D15.2 17.7,86.22 17.57,84.44 17.57,82.09 19.16,78.47 X1.5
  Bottom 0.813: X1.5 19.06,79.2 21.64,81.9 25.2,81.9 26.97,83.55 28.12,83.55 v28.24,83.68
N$12  (1 unrouted)
  Top 0.61: TP16.TP 2.2 | 46.78,77.71 46.78,85.73 D13.2
  Bottom 0.711: 44.8,58.66 44.8,54.47
  Bottom 0.813: X1.12 46.78,78.21 46.78,74.66 47.55,73.9 47.55,60.19 44.8,58.66 | 44.8,54.47 45.69,53.71 46.53,52.95 46.53,39.87 42.34,35.55 42.34,33.64 LED1.K 2.2
N$13  (1 unrouted)
  Top 0.61: TP17.TP 2.3 | X1.11 42.82,82 43.61,83.43 D12.2
  Bottom 0.406: 36.07,33.05 35.89,33.52 35.89,37.07 34.21,38.34
  Bottom 0.61: 37.26,33.05 36.07,33.05 | 34.21,38.34 34.21,45.52 38.28,51.68 38.28,52.82 38.78,53.2 39.55,53.2 40.83,54.1 40.83,54.27
  Bottom 0.711: 40.83,54.27 40.83,59.03
  Bottom 0.813: 2.3 37.26,33.05 | 40.83,59.03 40.83,59.44 41.45,61.46 41.45,72 42.85,73.39 42.85,74.56 X1.11
N$14  (1 unrouted)
  Top 0.61: TP18.TP 33.77,23.72 2.4 | X1.10 38.86,77.72 38.85,77.71 38.85,79.44 38.78,79.83 D2.2
  Bottom 0.406: 33.2,37.96 35.08,36.56 35.08,33.39 33.77,33.07
  Bottom 0.61: 36.89,52.19 33.2,46.47 33.2,37.96
  Bottom 0.711: 36.89,59.49 36.89,52.19
  Bottom 0.813: X1.10 38.85,78.2 38.85,73.84 40.31,71.49 40.31,61.9 36.89,59.49 | 33.77,33.07 33.75,25.82 2.4
N$15
  Top 0.406: Q4.2 Q2.2 7.29,43.3 7.54,43.3
  Top 0.813: IC4.3 7.54,43.3
N$16
  Top 0.406: 42.34,45.48 43.61,45.48 IC7.8 | 42.34,45.48 IC7.6 | 42.34,45.48 41.3,45.48 39.8,46.98 35.23,46.98 33.83,47.99 33.83,48.25 33.58,48.5 32.05,49.77 29.89,49.77 29.51,49.39 29.51,48.63 28.75,47.49 24.81,47.49 23.8,48.5 R5.1
N$17  (via drill 0.6)
  Top 0.406: IC3.12 8.69,11.23 9,11.86 9,13.45 7.42,16.31 v5.83,16.94 | R29.1 7.8,85.33 7.29,84.82 7.29,81.27 | U$3.3 11.67,86.22 v11.1,86.86
  Top 0.61: 7.29,81.27 7.29,78.47 X1.2
  Bottom 0.406: 1.7,61.46 0.71,60.57 0.71,51.61 2.78,46.6 2.78,20.43 v5.83,16.94 | v11.1,86.86 11.1,84.57 7.29,80.76 7.29,78.47 X1.2
  Bottom 0.61: X1.2 7.1,78.13 6.84,76.06 3.48,73.27 3.48,69.08 1.7,64.12 1.7,61.46 | X3.4 1.06,20.43 2.78,20.43
N$18
  Top 0.406: IC3.15 4.88,7.1 5.89,6.21 13.38,6.21 14.27,5.45 25.2,5.45 26.72,4.31 IC6.5
N$19
  Top 0.406: 19.31,26.61 20.11,26.7 20.11,32.82 19.94,32.82 LED7.K | 16.16,33.01 15.27,34.2 D14.2
  Top 0.61: LED7.K 16.16,33.01
  Top 1.016: 2.8 TP23.TP 19.31,26.61
  Bottom 0.61: 6.27,33.13 10.97,30.91 10.97,29.64 11.73,28.88 12.24,28.5 15.1,25.71 18.46,25.71 | 19.48,24.73 2.8
  Bottom 0.813: X1.14 7.18,52.42 6.27,50.28 6.27,33.13 | 18.46,25.71 19.48,24.73
N$20  (via drill 0.81)  (1 unrouted)
  Top 0.813: 14.27,31.61 13.13,32.5 13.13,36.06 v12.49,36.95 11.12,38.72
  Top 1.016: 1.9 16.25,20.81 TP9.TP 15.81,25.06 14.4,26.79 14.4,30.72 14.27,31.61
  Bottom 0.813: X1.17 19.06,53.37 19.35,52.69 20.24,51.04 20.75,50.03 20.75,42.66 19.1,41.14 14.65,41.14 v12.49,36.95
N$21  (via drill 0.6)
  Top 0.61: 6.91,31.04 5.13,32.31 5.13,37.88 5.51,38.72 | 5.51,38.72 8.56,38.72 9.96,40.82 18.84,40.82 19.92,39.67 v20.43,37.39 | D11.1 5.51,38.72
  Top 1.016: 6.91,31.04 6.91,28.05 9,26.09 TP11.TP 9.32,21.07 9.32,19.2 1.11
  Bottom 0.61: X1.19 26.98,53.02 27.86,50.53 27.86,41.07 23.54,37.39 v20.43,37.39
N$22
  Top 0.406: IC8.11 6.65,63.11 6.14,62.6 6.14,61.08 | 6.14,61.08 6.65,60.57 IC8.9 | 6.14,61.08 5.89,61.08 5.21,60.44 5.21,54.09 4.7,53.07 2.72,51.8 1.32,49.14 1.32,35.93 1.81,35.18 2.46,34.41 R35.2
N$23  (via drill 0.6)
  Top 0.406: X1.22 38.86,54.34 41.27,52.13 42.67,52.13 44.8,54.09 44.8,59.42 46.09,60.89 | 46.09,60.89 R1.2 | v43.36,59.8 44.76,59.42 46.09,60.89
  Bottom 0.406: D5.C 43.99,62.34 43.86,62.34 43.36,61.84 v43.36,59.8
N$24  (1 unrouted)
  Top 0.406: 48.44,69.71 48.44,64.76 46.91,63.74 R1.1 | IC10.3 44.24,68.44 45.64,69.84 46.91,69.84 | 46.91,69.84 48.44,69.84 | C8.1 46.91,69.84
N$25
  Top 0.406: IC6.13 25.45,10.4
  Top 0.61: TP6.TP 26.78,12.97 1.6 26.72,11.42 26.08,10.78 25.45,10.4
N$26
  Top 0.406: 1.7 24.77,15.73 24.81,11.16 24.18,10.53 IC6.14
  Top 0.61: TP7.TP 23.16,18.53 1.7
N$27  (via drill 0.6)  (1 unrouted)
  Top 0.406: TP26.TP 18.34,21.07 17.83,22.59 | R3.1 v33.7,52.19 33.7,53.33 32.94,54.09 32.94,57.9 31.42,59.42 29.39,59.42 28.24,60.31 R23.1
  Top 0.61: 17.83,22.66 v17.57,24.12
  Bottom 0.406: 16.56,22.98 15.67,23.86 12.88,26.53 11.61,27.04 | 31.86,33.07 32.41,33.9 32.41,36.56 32.31,36.95 | v33.7,52.19 33.45,51.42 33.44,51.43
  Bottom 0.508: 16.56,22.98 17.7,22.21 | 31.86,27.29 31.86,33.07 | 32.31,36.95 32.31,46.72 33.44,51.43
  Bottom 0.61: 31.86,27.29 30.72,25.26 28.88,22.09 27.99,21.2 25.83,21.2 24.18,23.74 22.66,23.74 21.64,21.7 20.62,21.07 18.84,21.07 17.7,22.21 v17.57,24.12 | 2.11 9.41,29.23 11.61,27.04
N$28  (via drill 0.6)
  Top 0.406: v27.48,35.55 27.86,34.66 27.86,25.9 26.75,24.78 2.6 | v30.66,52.57 28.88,54.34 28.88,58.41 28.12,59.17 25.07,59.17 25.07,62.73 25,63.23 25,65.84 25.45,66.35 29.64,66.35 | U$2.2 31.16,67.42
  Top 0.61: TP21.TP 26.78,23.7 2.6 | 31.16,67.42 29.64,66.35
  Bottom 0.406: v30.66,52.57 30.66,51.04 30.4,50.79 30.4,39.36 v27.48,35.55
N$29
  Top 0.61: JP3.1 R23.2
N$30
  Top 0.406: R25.2 C5.1 46.78,50.28 | IC7.9 42.47,50.41 43.1,50.91 45.26,50.91 45.9,50.28 46.78,50.28 | 46.78,50.28 R8.2
N$31
  Top 0.406: IC7.14 35.92,49.65 34.72,49.65 32.69,51.17 28.62,51.17 27.86,50.53 | R9.2 27.86,50.53 | 27.86,50.53 C9.2
N$32  (via drill 0.6)
  Top 0.305: 18.72,67.04 19.23,66.54 19.23,63.81 18.84,63.49
  Top 0.406: IC5.2 13.77,64.76 16.05,67.04 18.72,67.04 18.72,67.93 19.16,68.69 19.16,70.43 21.34,72.02 21.89,72.53 D3.2 22.06,74.03 C1.2 R24.1 14.91,74.16 13.44,75.68 13.44,80.51 13.57,80.69 13.89,81.27 v14.15,81.65 14.02,81.9 13.57,82.48 U$3.6 | 18.84,63.49 IC5.6
N$34
  Top 0.61: LED6.K 24.65,31.38 R4.1
N$35
  Top 0.406: R5.2 17.79,48.5 IC4.1
  Top 0.61: R18.1 15.14,48.4 IC4.1
  Bottom 0.711: 17.09,53.84 17.09,59.36
  Bottom 0.762: 22.86,63.36 22.86,69.84
  Bottom 0.813: 17.09,53.84 18.21,51.42 IC4.1 | 19.12,62.62 22.86,63.36
  Bottom 1.016: 17.09,59.36 19.12,62.62 | X1.7 27.08,78.12 27.08,75.52 25.83,74.66 25.07,72.89 22.86,69.84
N$36
  Top 0.406: R9.1 24.31,51.04 12.37,51.04 9.8,49.75 9.8,49.26 Q4.1 9.6,46.98 Q2.1
N$37  (via drill 0.6)
  Top 0.406: IC3.2 4.88,4.24 v2.97,5.58 | IC6.7 29.26,4.81 v29,5.07
  Bottom 0.406: 3.48,5.07 3.99,4.56 14.91,4.56 15.16,4.81 17.32,4.81 18.08,1.26 29,1.26 v29,5.07
  Bottom 0.61: v2.97,5.58 3.48,5.07
N$38
  Top 0.406: 1.3 36.74,17.89 33.58,17.89 32.05,16.37 32.05,13.83 27.99,10.15 IC6.11
  Top 0.61: TP3.TP 37.48,18.21 1.3
N$39
  Top 0.406: 1.5 30.25,15.85 29.13,14.73 29.13,12.43 27.86,11.16 27.1,10.53 26.72,10.15 IC6.12
  Top 0.61: 1.5 28.6,18.44 TP5.TP
N$41
  Top 0.61: LED1.A 41.07,35.55 41.58,36.06 41.58,37.64 R11.1 | LED2.A LED3.A LED4.A
  Bottom 0.508: 24.43,31.61 22.4,31.61
  Bottom 0.61: LED1.A LED2.A | 24.43,31.61 24.81,31.61 28.5,33.77 LED4.A | 22.4,31.61 21.26,32.5 21.26,34.04 LED7.A
N$42
  Top 0.406: X1.16 15.1,58.47 15.16,58.53 19.35,61.08 19.99,61.08 R33.2
N$43
  Top 0.406: Q1.1 32.2,91.71 Q3.1 31.93,93.79 31.93,92.7 32.69,91.94 R13.2
N$44  (via drill 0.6)
  Top 0.406: IC6.2 IC6.1 20.98,2.4 18.72,2.4 | 18.72,2.4 16.3,2.4 13.26,5.32 7.03,5.32 6.14,4.43 IC3.3 | Q11.1 15.8,9.01 v16.3,7.99 | v18.72,3.29 18.72,2.4
  Bottom 0.406: v16.3,7.99 17.07,7.99 18.72,5.2 v18.72,3.29
N$45
  Top 0.406: C2.1 29.92,43.62 R10.1 R12.2
N$46
  Top 0.406: IC7.4 39.8,45.71 39.04,46.22 34.72,46.22 32.69,47.74 31.93,48.37 R12.1 30.25,48.12 C3.1
N$47
  Top 0.406: R17.2 R16.2 37.13,38.6 37.64,39.1 39.29,39.1 R15.1 41.07,41.01 IC7.5
N$48
  Top 0.406: R7.2 29.39,74.79 31.8,74.79 Q10.3
N$49
  Top 0.406: R17.1 32.18,38.22 29.97,38.22 D8.1
N$50  (via drill 0.6)
  Top 0.406: IC6.4 25.45,4.12 24.81,4.56 18.91,4.56 v16.56,3.67
  Top 0.61: v1.7,3.29 3.6,3.29 IC3.1
  Bottom 0.406: v16.56,3.67 16.56,3.74 16.5,3.68
  Bottom 0.61: 16.5,3.68 16.37,3.67 2.21,3.67 v1.7,3.29
N$52
  Top 0.406: 19.8,12.89 1.8 19.12,12.31 Q11.3 | 19.92,15.67 TP8.TP
  Top 0.61: TP8.TP 19.8,12.99 | 19.8,12.81 19.8,12.99 | 19.8,12.99 1.8
N$53  (via drill 0.6)
  Top 0.61: TP25.TP 12.81,23.8
  Top 0.813: v12.81,30.59 12.81,23.8 2.10
  Bottom 0.813: X1.15 8.24,36.56 8.24,34.28 12.11,32.5 12.81,31.1 v12.81,30.59
N$54
  Top 0.813: D1.1 35.48,92.19 35.61,92.32
  Top 1.27: 35.61,92.32 36.37,92.95 R27.1
N$55
  Top 0.61: TP19.TP 31.14,31.86 30.25,30.98 2.5 | X1.9 35.23,80.2 35.23,85.02 D1.2
  Bottom 0.406: LED4.K 31.57,34.22 31.57,36.44 31.29,36.82 | 32.97,53.93 32.97,57.17 32.94,58.92
  Bottom 0.61: 2.5 LED4.K | 31.29,36.82 31.29,47.08 32.05,50.28 32.05,52.06 32.97,53.74 32.97,53.93 | X1.9 34.97,78.08 34.97,73.9 39.29,69.33 39.29,62.73 32.94,58.92
N$56  (1 unrouted)
  Top 0.406: IC3.14 6.14,7.74 6.78,7.1 13.64,7.1 14.65,6.34 25.7,6.34 27.99,4.43 27.99,2.65
N$57  (via drill 0.6)  (1 unrouted)
  Top 0.406: v41.01,5.51 40.75,1.26 35.23,1.26 35.1,1.64 | Q8.1 49.45,24.12 49.45,13.91 Q7.1 | 41.07,8.62 X2.2 | 32.05,8.8 32.05,9.13 32.18,9.26 | 33.5,9.26 T1.4
  Top 0.61: T1.2 36.62,6.85 35.1,5.32 | T1.4 33.58,6.59 | X2.2 41.07,5.83 | 41.07,5.83 v41.01,5.51 | 41.07,5.83 41.07,3.99 R38.1 | 35.1,5.32 T1.6 35.1,1.64 | 35.1,5.32 33.58,6.59 | 42.59,9.89 41.07,8.62 | Q7.1 47.42,12.33 Q7.2 | 47.17,9.89 47.17,5.32 | 48.94,9.13 46.91,9.13 | 47.42,8.37 45.39,8.37 | 33.5,9.26 32.18,9.26 | 33.58,6.59 33.58,3.04
  Top 0.813: 47.17,9.89 42.59,9.89
  Top 1.27: 32.05,8.8 32.05,3.29
  Bottom 0.406: Q6.2 26.85,6.34 30.1,6.34 30.1,4.81 Q5.1
  Bottom 0.61: X2.2 v41.01,5.51 40.75,3.92 | Q6.1 Q6.2 | Q5.1 34.06,4.03 T1.6 39.24,2.98 39.8,3.54 40.63,3.54 R39.1
  pour Top: 44.88,13.2 44.88,2.02 49.96,2.02 49.96,13.2
N$59
  Top 0.406: Q8.2 47.42,16.5 43.86,14.97 43.86,12.43 TP2.TP | 36.62,3.42 36.62,3.04 36.75,2.91
  Top 0.61: TP2.TP 41.58,12.3 40.95,12.3 1.2 40.56,10.91 39.55,9.13 39.55,7.35 38.28,6.08 38.28,2.78 38.15,2.91 | T1.8 38.15,2.91 | 36.75,2.91 38.15,2.91 | 36.88,4.31 36.62,3.42 | 48.31,21.07 48.31,19.67 | 46.53,21.07 46.53,19.67
  Bottom 0.61: Q5.2 37.51,6.34 37.51,8.32 40.61,11.41 40.61,12.8 1.2
  pour Top: 46.15,23.86 46.15,17.01 44.88,15.74 35.48,15.23 35.48,1.51 40.56,1.51 40.56,9.13 44.63,13.2 44.88,13.2 45.39,13.83 49.2,13.83 49.2,23.86
N$61  (1 unrouted)
  Top 0.305: 24.18,2.78 24.18,1.13 20.75,1.13 20.24,1.51
  Top 0.406: 20.24,1.51 15.92,1.51 12.94,4.48 9.96,4.48 IC3.6
N$63
  Top 1.422: 23.67,60.57 22.53,60.57
N$64
  Top 0.61: IC4.2 R18.2
N$65
  Top 0.406: R26.2 14.02,60.57 14.91,61.33 15.98,62.22 IC5.5
N$67
  Top 0.406: IC6.10 29.26,10.15 31.55,12.05 32.86,12.05 1.4
  Top 0.61: TP4.TP 33.77,12.96 1.4
N$69
  Top 0.61: TP1.TP 1.1
  Bottom 0.406: 49.33,82.03 49.33,52.38
  Bottom 0.508: 48.37,38.79 48.37,30.09
  Bottom 0.61: 48.82,39.87 48.37,38.79
  Bottom 0.813: 43.99,83.94 45.01,82.92 47.99,82.92 49.33,82.03 | 49.33,52.38 48.82,49.26 48.82,39.87
  Bottom 1.016: X1.1 3.29,80.51 4.88,82.41 5.45,82.41 10.97,90.41 43.99,90.41 43.99,83.94 | 48.37,30.09 46.72,28.25 46.72,22.57 1.1
N$83
  Top 0.406: 46.66,44.95 45.26,44.95 IC7.7 | 46.47,46.03 R25.1 46.66,46.22 46.66,44.95 | 46.66,44.95 46.66,43.93 R6.1
N$84  (via drill 0.8)  (1 unrouted)
  Top 0.406: 36.88,51.68 R3.2 36.62,52.69 34.97,54.34 34.97,56.29 X1.21 35.35,56.44 35.35,61.46 | Q9.2 T3.C
  Top 0.61: 35.35,61.46 Q9.2
  Top 0.813: IC6.16 21.64,8.88 v19.99,8.88
N$85  (1 unrouted)
  Top 0.406: Q9.1 33.94,64.24 34.72,65.15 R32.2 | 33.25,62.98 32.16,62.98 T3.B
N$86
  Top 0.406: R26.1 10.59,60.95 10.59,63.49 | 10.59,63.49 IC5.3 | IC8.12 9.7,64.38 10.59,63.49
N$87
  Top 0.406: R33.1 22.34,63.11 22.34,68.44 22.66,69.33 D3.1
N$88  (via drill 0.6)
  Top 0.406: IC6.15 23.04,9.03 v23.04,11.93 | R13.1 v32.69,81.27
  Bottom 0.406: v23.04,11.93 24.81,14.47 24.81,15.48 25.58,16.24 28.37,16.24 29.13,15.48 30.66,15.48 34.47,19.29 34.97,19.29 36.5,20.82 37.9,20.82 39.67,19.04 41.58,19.04 45.64,23.1 45.64,29.2 47.6,31.23 47.6,36.56 47.55,38.09 47.55,50.79 48.61,53.84 48.61,81.01 47.67,81.78 33.7,81.78 v32.69,81.27
N$89
  Top 0.406: IC8.14 9.7,66.92 11.35,69.58 12.75,69.58 R34.1 | 14.15,70.47 R34.1 | C10.1 16.18,68.69 14.78,70.47 R34.1
N$90  (via drill 0.5)
  Top 0.254: R35.1 4.49,27.67 v4.62,27.8 4.49,27.93 2.46,28.69
  Top 0.406: TP13.TP 5.76,23.73 2.12 5.49,23.99 4.37,23.99 2.46,25.9 R35.1
N$92
  Top 0.406: IC10.1 41.45,65.9 40.82,66.54 R42.2
N$93  (via drill 0.6)
  Top 0.813: D11.2 8.94,35.25 D10.2 11.1,34.28 v9.57,35.42
  Top 1.016: 1.10 TP10.TP 13.38,18.02 11.87,19.54 10.91,22.4 10.91,26.15 11.22,26.47 11.22,32.25 8.94,32.75
  Top 1.93: 8.94,32.75 8.94,35.25
  Bottom 0.61: 17.19,63.73 17.46,63.73 | SJ1.1 17.19,65.01 17.97,64.24
  Bottom 0.711: 13.13,54.22 13.13,59.55
  Bottom 0.813: v9.57,35.42 9.57,36.82 13.13,54.22 | 13.13,59.55 17.09,63.36 17.46,63.73 17.97,64.24 18.74,65.01 JP1.1
N$94
  Bottom 0.61: 17.58,69.49 17.19,68.6 SJ1.2
  Bottom 0.813: 22.4,87.36 R36.2 | 22.4,87.36 R37.2 | JP1.2 19.48,67.55 17.58,69.49 17.07,69.97 17.07,81.39 22.4,86.6 22.4,87.36
N$95
  Top 0.813: JP2.2 46.78,93.21 46.91,92.32 D13.1
N$96
  Top 0.406: C11.1 R42.1 R43.1
N$97
  Top 0.406: IC10.5 37.71,69.9 36.88,70.73 | 36.88,70.73 36.24,71.36 34.34,71.36 R44.2 | R43.2 38.02,71.87 36.88,70.73
N$98
  Top 0.406: 15.18,38.22 15.18,38.68 D14.1
  Top 0.61: JP4.1 15.59,39.36 D14.1
N$99
  Top 0.406: 29.39,71.62 30.27,71.23 | R7.1 29.39,71.62 | 29.39,71.62 26.72,71.62 26.21,72 R14.1
  Top 0.813: 30.27,71.23 U$2.3
N$101
  Top 0.406: R45.1 41.2,61.58 42.85,63.23 43.48,63.23 R46.2 42.85,63.36 41.83,64.76 40.56,64.76 39.8,65.52 39.8,67.81 39.29,68.31 37.84,68.31 IC10.6
N$580  (1 unrouted)
  Top 0.406: IC7.1 34.85,43.68 33.77,43.3 R19.2 32.43,43.3 32.05,42.53 31.93,42.28 R10.2
VCC  (via drill 0.6)
  Top 0.406: R19.1 33.77,45.26 34.85,45.43 38.53,45.43 IC7.3 38.53,41.64 38.02,41.14 38.02,41.07 R15.2 | R6.2 47.67,42.41 45.01,42.41 43.87,41.27 43.74,41.27 | IC2.1 44.27,36.47 43.86,35.93 | R45.2 39.42,63.36 | 39.42,63.36 37.77,65.01 37.77,65.84 IC10.8 | 39.42,63.36 39.42,60.57 40.82,59.17 40.82,53.84 v42.09,53.07 | 6V.TP 42.72,32.63 43.8,33.71
  Top 0.61: v36.88,40.12 R15.2 | 43.1,35.93 43.1,37.83 | 43.1,37.83 43.1,39.36 | C4.1 43.8,33.71 43.86,33.77 | R11.2 43.1,37.83
  Top 0.813: 43.1,35.93 43.86,35.93 IC1.OUT 43.86,33.77 | 43.1,39.36 43.1,40.63 | 43.1,40.63 v42.98,40.5 | 43.74,41.27 43.1,40.63
  Bottom 0.406: v42.09,53.07 42.09,50.91 43.36,49.26 43.74,48.88 43.74,42.15 42.98,41.39 v42.98,40.5
  Bottom 0.61: v42.98,40.5 37.39,40.5 v36.88,40.12

## Text on the board
Bottom: top | BEP V3.1 / maru-labs.com
tPlace: 3 | 1 | b | c | a | 4 | 2 | 5 | 5 | 4 | 3 | 1 | 2
bPlace: QC
tNames: 78L10 | BSS138 | 78L06 | < / / > / / G5 / / G3 / / G1 / / / BAT | GND / / <> / / N / / G4 / / G2 / / CC | BSS138 | N | N
bNames: 1 BAT / 2 GC / 3 GB / 4 GA / / / 7 RES / 8 ABS / 9 ALT / 10 TMP / OIL | solder / bridge to / enable / Choke / on WRN | CHK | BL <> / Resistor | GND / BT / HiB | 18 | 19 | 13 / 14 / 15 / 16 / 17 / / / / 21 SPDin / 22 SPDout / 23 / 24 | RPM | solder / bridge to / enable / Bulb Test / on WRN | ALT / TMP / OIL / CHK / SWP | WRN | 2.7 / 2.6 | 2.12 / 2.11 / 2.10 / / / / / 2.5 / 2.4 / 2.3 / 2.2 / 2.1 | RPM / SPD / HiB | GND c b a 12V | 1.12 GND / 1.11< / 1.10<> / 1.9 > / 1 8 N / 1.7 G5 / 1.6 4 / 1.5 G3 / 1.4 G2 / 1.3 G1 | 1.2 CC | 1.1 BAT
tValues: M7 | BA | M7 | SS12 | SS12 | SS12 | 1 BAT / 2 GC / 3 GB / 4 GA / 5 START / 6SWP / 7RES / 8 ABS / 9ALT / 10 TMP / 11 OIL / 12 CHK | M7 | 13 GND / 14 BT / 15 HiB / 16RPM / 17 > / 18 GND / 19 < / / 21SPD in / 22SPD out / 23 GND | 6,8 | 4 | BA | 4.7V | M7 | M7 | M7 | 6V | SS12 | SPD / / WRN / / ABS / / ALT / / OIL / / SWP | 2.4/1.1V | RPM / / HiB / / BT / / BAR / / TMP / / CHK | BA | BA
bValues: 2.2 kOhm / SPD / Pull-up / (Middle / Switch ) | OFF ON | OFF/ ON | BAR/RES | Mode / Selector | > | > | BAR/RES | ABS | BT
bStop: BEP V3.0 / maru-labs.com